# EAGLE board SHT4x_2 (EAGLE 9.6.2)
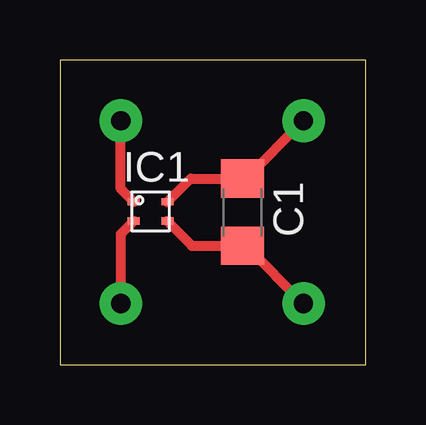
[diagram p0: board, top side]

Size 12.75 x 12.69 mm. Coordinates in mm from the lower left corner, seen from the top.
Outline: 0,0 12.75,0 12.75,12.69 0,12.69 0,0
Copper layers (1*16): Top 0.035mm / dielectric 1.5mm / Bottom 0.035mm
Design rules "default": minimum track width 6mil, minimum drill 0.35mm, track to track 6mil, track to pad 6mil, pad to pad 6mil, via to via 6mil, smd to smd 6mil, copper to edge 40mil, drill to drill 6mil, minimum pad ring 10mil, minimum via ring 8mil, stop-mask expansion 4mil, vias tented up to drill 0mil, thermal gap 10mil

## Footprints (pad centres in the part's own frame; a part is rotated, then mirrored left to right if it is on the bottom)
C1206 = smd 1.6 x 1.8: 1 -1.4,0; 2 1.4,0
SHT4X = smd 0.5 x 0.3: SCL -0.73,-0.37; SDA -0.73,0.43; VDD 0.67,-0.37; VSS 0.67,0.43
PIN = drill 0.8 pad 1.778: P$1 0,0

## Placement (x,y rotation side)
C1  [C1206]  7.62,6.35 270 top
IC1  SHT4X  [SHT4X]  3.81,6.35 0 top
P1  [PIN]  2.54,10.16 0 top
P2  [PIN]  2.54,2.54 0 top
P3  [PIN]  10.16,2.54 0 top
P4  [PIN]  10.16,10.16 0 top

## Library data of the parts
C1 = Standardbauteile
IC1 = Microcontroller-Periphery
P1-P4 = Mechanik

## Nets
GND: C1.2 IC1.VDD P3.P$1
N$1: C1.1 IC1.VSS P4.P$1
N$2: IC1.SCL P2.P$1
SDA: IC1.SDA P1.P$1

## Tracks (layer width: path | path; a pad name or v marks a point on that pad's centre or on a via)
GND
  Top 0.406: IC1.VDD 5.51,4.95 C1.2 7.75,4.95 P3.P$1
N$1
  Top 0.406: IC1.VSS 5.45,7.75 C1.1 7.75,7.75 P4.P$1
N$2
  Top 0.406: IC1.SCL 2.54,5.44 P2.P$1
SDA
  Top 0.406: IC1.SDA 2.54,7.32 P1.P$1